# Altium PCB ElectronBot_ASCII.PcbDoc
Units mil, origin at the board's own origin, x right, y up, seen from the top; angles counter-clockwise.
Board outline 1479.69 x 1548.74 mil, 2 copper layers (Top1, Bottom2), stack 42.17 mil thick; 49 components, 55 nets, 261 pads, 229 vias.
Unrouted connection lines stored in the file: 11.
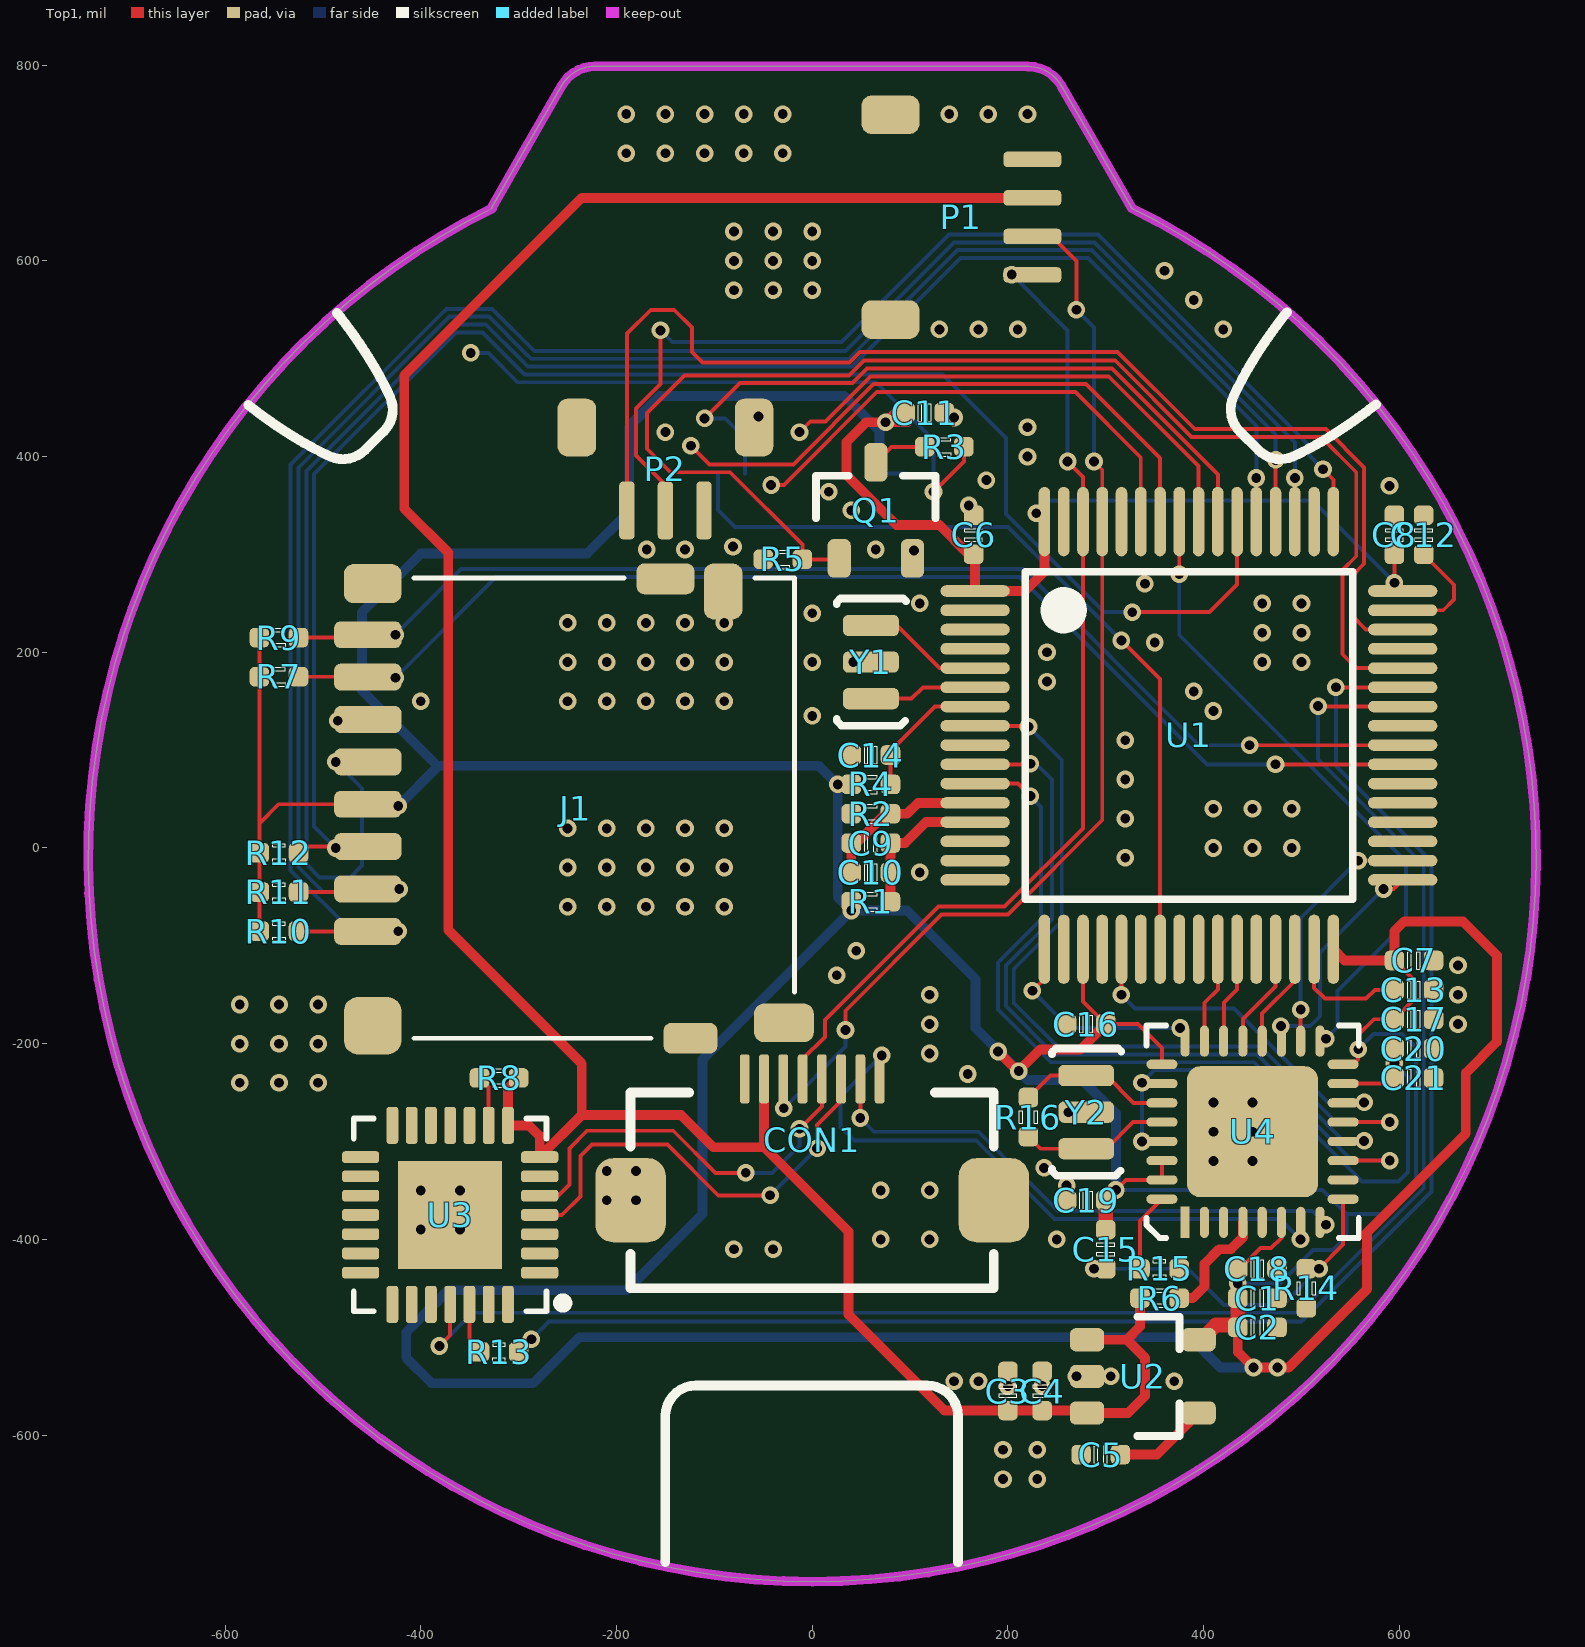
[diagram p0: Top1 view]
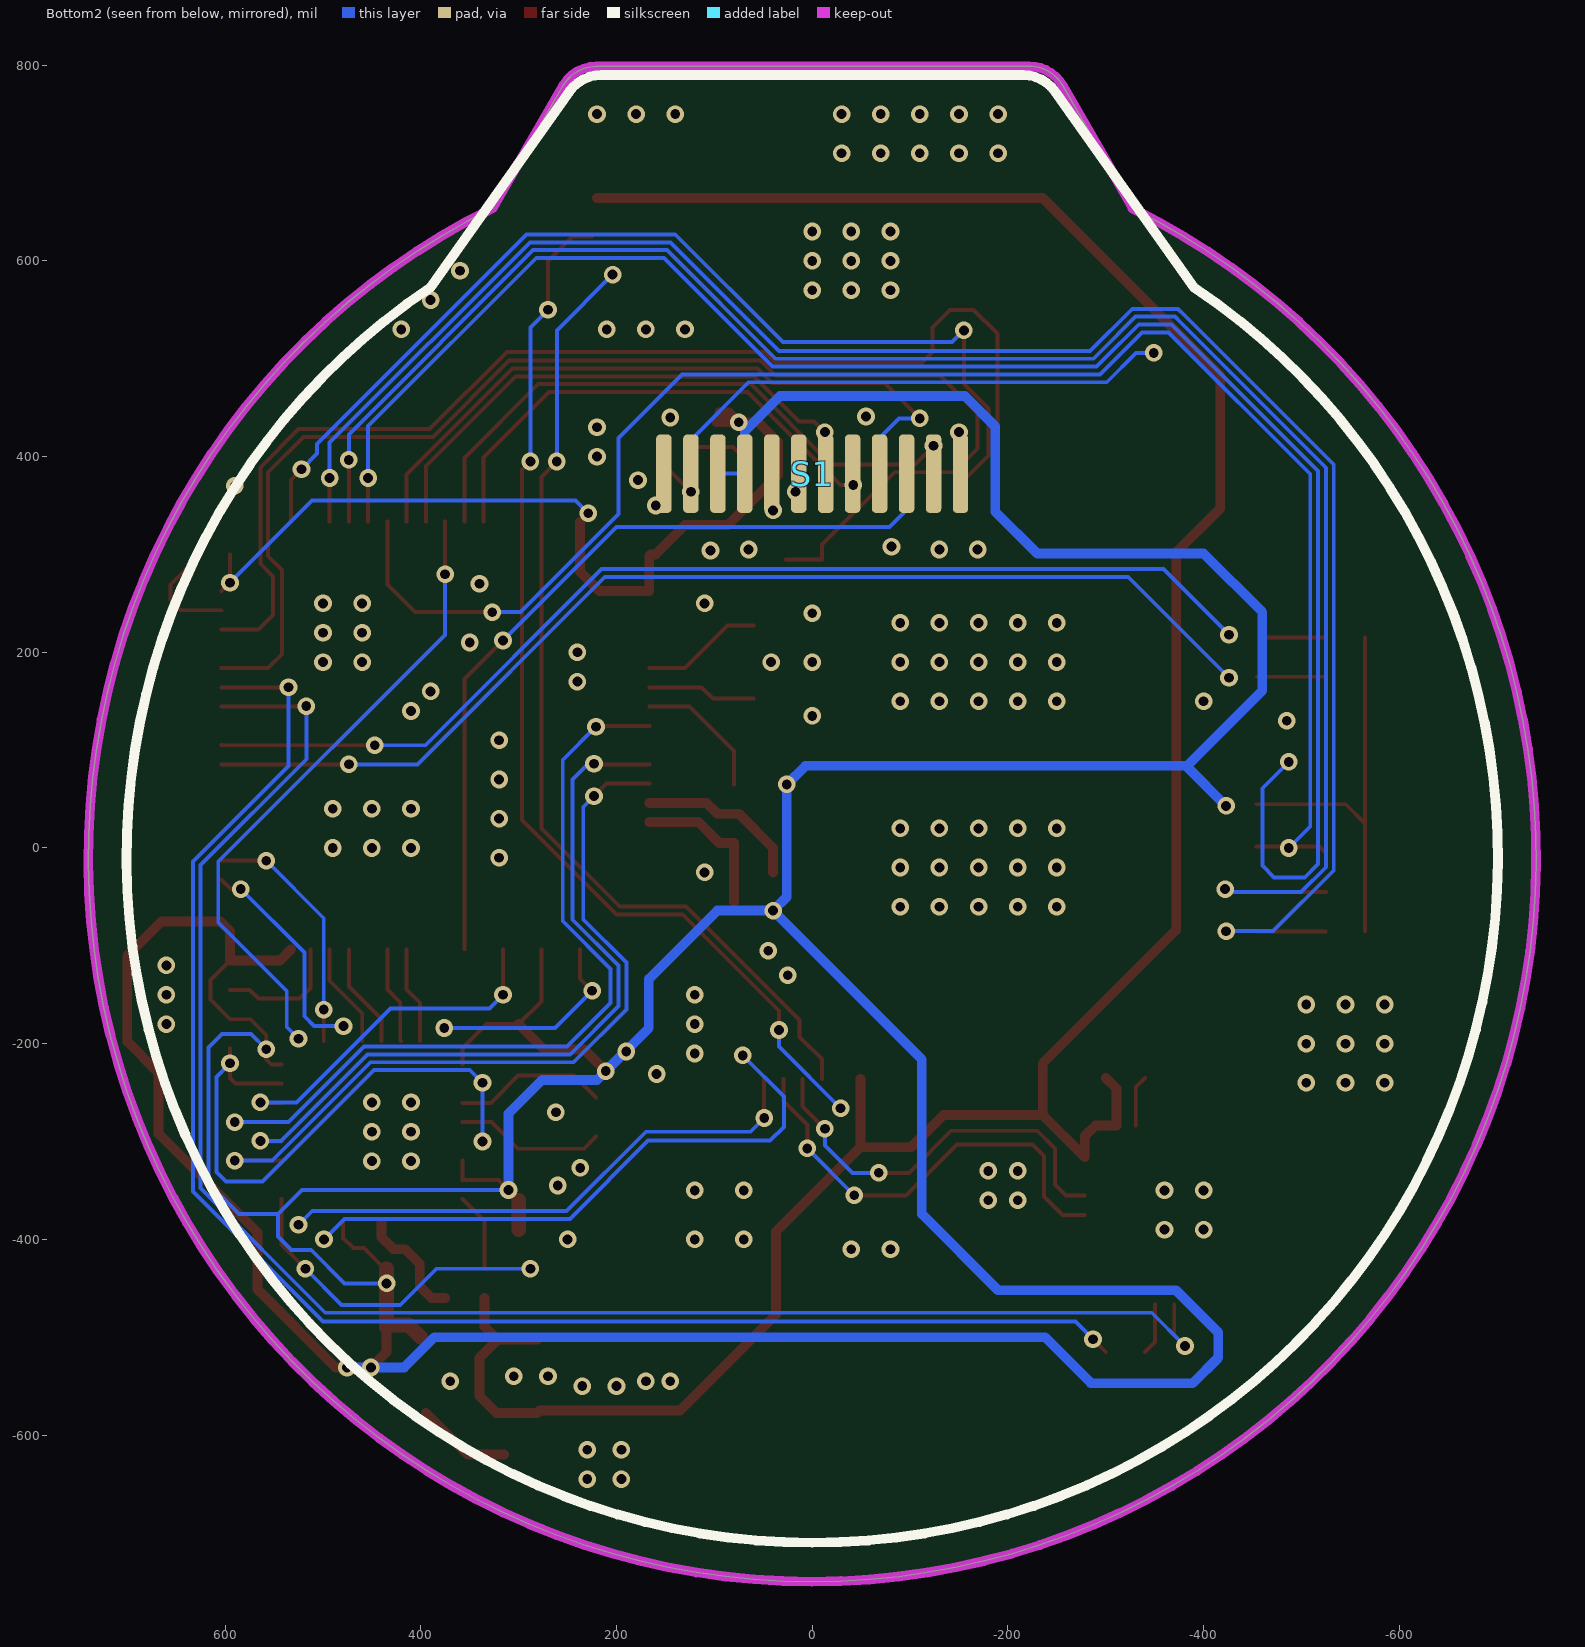
[diagram p1: Bottom2 view, seen from below]

## Layer stack, top to bottom
Top Solder: solder mask 0.4, Solder Resist, Dk 3.5
Top1: signal copper 1.4
Dielectric 1: prepreg 39.3701, PP-006, Dk 4.1
Bottom2: signal copper 1.4
Bottom Solder: solder mask 0.4, Solder Resist, Dk 3.5

## Board outline
-327.58,654.33 -292.13,716.15 -256.03,779.09 cw(c-221.88,759.5) -221.87,798.87 220.56,798.71 cw(c220.54,759.34) 254.64,779.01 290.88,716.22 326.65,654.22 326.51,653.93 cw(c0,-10)

## Design rules (kind name [scope] priority, off if disabled: settings)
AssemblyTestPointUsage [All] p0: scope1count=1 scope1_0_kind=Board scope1_0_value=Board scope2count=1 scope2_0_kind=Board scope2_0_value=Board commentlength=0
AssemblyTestpoint [All] p0: scope1count=1 scope1_0_kind=Board scope1_0_value=Board scope2count=1 scope2_0_kind=Board scope2_0_value=Board commentlength=0
Clearance Clearance_Logo [All] p0: scope1count=1 scope1_0_kind=NetClass scope1_0_value=Logo scope2count=1 scope2_0_kind=Board scope2_0_value=Board commentlength=0 gap=8
Clearance [All] p0: scope1count=1 scope1_0_kind=Board scope1_0_value=Board scope2count=1 scope2_0_kind=Board scope2_0_value=Board commentlength=0 gap=4
Clearance Clearance_Logo [InNetClass('Logo')] p1: gap=8 ignorepadtopadclearanceinfootprint=FALSE
Clearance [All] p2: gap=4 ignorepadtopadclearanceinfootprint=FALSE except(0: Arc-Hole Track-Hole SMDPad-Hole THPad-Hole Via-Hole Fill-Hole Poly-Hole Region-Hole Text-Hole)
ComponentClearance [All] p0: scope1count=1 scope1_0_kind=Board scope1_0_value=Board scope2count=1 scope2_0_kind=Board scope2_0_value=Board commentlength=0 gap=0 collisioncheckmode=3
ComponentClearance [All] p1: gap=0 collisioncheckmode=3 verticalgap=0 showdistances=FALSE
DiffPairsRouting [All] p0: scope1count=1 scope1_0_kind=Board scope1_0_value=Board scope2count=1 scope2_0_kind=Board scope2_0_value=Board commentlength=0
DiffPairsRouting [All] p1: maxlimit=9 minlimit=9 mostfreqgap=9 toplayer_minwidth=15 toplayer_maxwidth=15 toplayer_prefwidth=15 bottomlayer_minwidth=15 bottomlayer_maxwidth=15 bottomlayer_prefwidth=15 maxuncoupledlength=500
FabricationTestPointUsage [All] p0: scope1count=1 scope1_0_kind=Board scope1_0_value=Board scope2count=1 scope2_0_kind=Board scope2_0_value=Board commentlength=0 valid=0 allowmultiple=FALSE
FabricationTestpoint [All] p0: scope1count=1 scope1_0_kind=Board scope1_0_value=Board scope2count=1 scope2_0_kind=Board scope2_0_value=Board commentlength=0 side=3 testpointundercomponent=TRUE minsize=40 maxsize=100 preferedsize=60 minholesize=0 maxholesize=40 preferedholesize=32 testpointgrid=1
FanoutControl Fanout_BGA [All] p0: scope1count=1 scope1_0_kind=Board scope1_0_value=Board scope2count=1 scope2_0_kind=Board scope2_0_value=Board commentlength=26 // Fanout_BGA (Default Rule)
FanoutControl Fanout_LCC [All] p0 off: scope1count=1 scope1_0_kind=Board scope1_0_value=Board scope2count=1 scope2_0_kind=Board scope2_0_value=Board commentlength=69 // Protel DXP Scope 1 Expression Was: IsLCC   Fanout_LCC (Default Rule)
FanoutControl Fanout_SOIC [All] p0 off: scope1count=1 scope1_0_kind=Board scope1_0_value=Board scope2count=1 scope2_0_kind=Board scope2_0_value=Board commentlength=71 // Protel DXP Scope 1 Expression Was: IsSOIC   Fanout_SOIC (Default Rule)
FanoutControl Fanout_Small [All] p0 off: scope1count=1 scope1_0_kind=Board scope1_0_value=Board scope2count=1 scope2_0_kind=Board scope2_0_value=Board commentlength=84 // Protel DXP Scope 1 Expression Was: (CompPinCount < 5)   Fanout_Small (Default Rule)
FanoutControl Fanout_Default [All] p0: scope1count=1 scope1_0_kind=Board scope1_0_value=Board scope2count=1 scope2_0_kind=Board scope2_0_value=Board commentlength=30 // Fanout_Default (Default Rule)
FanoutControl Fanout_BGA [All] p1: bgadir=Out bgaviamode=Centered fanoutstyle=Auto fanoutdirection=Alternating viagrid=1 // Fanout_BGA (Default Rule)
Height [All] p0: scope1count=1 scope1_0_kind=Board scope1_0_value=Board scope2count=1 scope2_0_kind=Board scope2_0_value=Board commentlength=0
HoleSize [All] p0: scope1count=1 scope1_0_kind=Board scope1_0_value=Board scope2count=1 scope2_0_kind=Board scope2_0_value=Board commentlength=0 absolutevalues=TRUE maxlimit=10000 minlimit=8 maxpercent=80.000 minpercent=20.000
HoleSize [All] p1: absolutevalues=TRUE maxlimit=10000 minlimit=8 maxpercent=80.000 minpercent=20.000
HoleToHoleClearance [All] p0: scope1count=1 scope1_0_kind=Board scope1_0_value=Board scope2count=1 scope2_0_kind=Board scope2_0_value=Board commentlength=0
LayerPairs [All] p0: scope1count=1 scope1_0_kind=Board scope1_0_value=Board scope2count=1 scope2_0_kind=Board scope2_0_value=Board commentlength=0 enforce=TRUE
MinimumSolderMaskSliver [All] p0 off: scope1count=1 scope1_0_kind=Board scope1_0_value=Board scope2count=1 scope2_0_kind=Board scope2_0_value=Board commentlength=0
MinimumSolderMaskSliver [All] p1 off: minsoldermaskwidth=2
NetAntennae [All] p0: scope1count=1 scope1_0_kind=Board scope1_0_value=Board scope2count=1 scope2_0_kind=Board scope2_0_value=Board commentlength=0
PasteMaskExpansion [All] p0: scope1count=1 scope1_0_kind=Board scope1_0_value=Board scope2count=1 scope2_0_kind=Board scope2_0_value=Board commentlength=0 expansion=0
PlaneClearance [All] p0: scope1count=1 scope1_0_kind=Board scope1_0_value=Board scope2count=1 scope2_0_kind=Board scope2_0_value=Board commentlength=0 clearance=8
PlaneClearance [All] p1: clearance=8
PlaneConnect [All] p0: scope1count=1 scope1_0_kind=Board scope1_0_value=Board scope2count=1 scope2_0_kind=Board scope2_0_value=Board commentlength=0 planeconnectstyle=Direct reliefexpansion=20 reliefentries=4 reliefconductorwidth=10 reliefairgap=10
PlaneConnect [All] p1: planeconnectstyle=Direct reliefexpansion=20 reliefentries=4 reliefconductorwidth=10 reliefairgap=10
PolygonConnect [All] p0: scope1count=1 scope1_0_kind=Board scope1_0_value=Board scope2count=1 scope2_0_kind=Board scope2_0_value=Board commentlength=0 connectstyle=Direct reliefconductorwidth=10 reliefentries=4 polygonreliefangle="90 Angle"
PolygonConnect [All] p1: connectstyle=Direct reliefconductorwidth=10 reliefentries=4 polygonreliefangle="90 Angle" airgapwidth=10
RoutingCorners [All] p0: scope1count=1 scope1_0_kind=Board scope1_0_value=Board scope2count=1 scope2_0_kind=Board scope2_0_value=Board commentlength=0 cornerstyle=45-Degree minsetback=100 maxsetback=100
RoutingLayers [All] p0: scope1count=1 scope1_0_kind=Board scope1_0_value=Board scope2count=1 scope2_0_kind=Board scope2_0_value=Board commentlength=0 top layer=Automatic bottom layer=Automatic
RoutingPriority [All] p0: scope1count=1 scope1_0_kind=Board scope1_0_value=Board scope2count=1 scope2_0_kind=Board scope2_0_value=Board commentlength=0
RoutingTopology [All] p0: scope1count=1 scope1_0_kind=Board scope1_0_value=Board scope2count=1 scope2_0_kind=Board scope2_0_value=Board commentlength=0 topology=Shortest
RoutingVias [All] p0: scope1count=1 scope1_0_kind=Board scope1_0_value=Board scope2count=1 scope2_0_kind=Board scope2_0_value=Board commentlength=0 holewidth=8 width=16 viastyle="Through Hole" minholewidth=6 minwidth=12 maxholewidth=28 maxwidth=50
RoutingVias [All] p1: holewidth=8 width=16 viastyle="Through Hole" minholewidth=6 minwidth=12 maxholewidth=28 maxwidth=50
ShortCircuit [All] p0: scope1count=1 scope1_0_kind=Board scope1_0_value=Board scope2count=1 scope2_0_kind=Board scope2_0_value=Board commentlength=0 allowed=FALSE
SilkToBoardRegionClearance [All] p0: scope1count=1 scope1_0_kind=Board scope1_0_value=Board scope2count=1 scope2_0_kind=Board scope2_0_value=Board commentlength=0
SilkToSilkClearance [All] p0: scope1count=1 scope1_0_kind=Board scope1_0_value=Board scope2count=1 scope2_0_kind=Board scope2_0_value=Board commentlength=0
SilkToSilkClearance [All] p1: silktosilkclearance=0
SilkToSolderMaskClearance [All] p0 off: scope1count=1 scope1_0_kind=Board scope1_0_value=Board scope2count=1 scope2_0_kind=Board scope2_0_value=Board commentlength=44 // Protel DXP Scope 1 Expression Was: IsPad
SilkToSolderMaskClearance [IsPad] p1: minsilkscreentomaskgap=0 clearancetoexposedcopper=TRUE
SolderMaskExpansion [All] p0: scope1count=1 scope1_0_kind=Board scope1_0_value=Board scope2count=1 scope2_0_kind=Board scope2_0_value=Board commentlength=0 expansion=3
SolderMaskExpansion [All] p1: expansion=3
UnRoutedNet [All] p0: scope1count=1 scope1_0_kind=Board scope1_0_value=Board scope2count=1 scope2_0_kind=Board scope2_0_value=Board commentlength=0
UnpouredPolygon [All] p0: scope1count=1 scope1_0_kind=Board scope1_0_value=Board scope2count=1 scope2_0_kind=Board scope2_0_value=Board commentlength=0
Width Logo [All] p0: scope1count=1 scope1_0_kind=NetClass scope1_0_value=Logo scope2count=1 scope2_0_kind=Board scope2_0_value=Board commentlength=0 maxlimit=100 minlimit=0.1 preferedwidth=10
Width VCC [All] p0 off: scope1count=1 scope1_0_kind=Board scope1_0_value=Board scope2count=1 scope2_0_kind=Board scope2_0_value=Board commentlength=237 maxlimit=50 minlimit=4 preferedwidth=10 // Protel DXP Scope 1 Expression Was: (InNet('VDD_SYS_3.3V') OR InNet('VDD_AV_3.3V') OR InNet('VDD_5V') OR InNet('VDD1V2-SYS') OR InNet('VDD1V1-EPHY') OR InNet('VDD-CPUX') OR InNet('VDD-CPUS') OR InNet('VDD-CPUFB') OR InNet('VCC-DRAM'))
Width GND [All] p0 off: scope1count=1 scope1_0_kind=Board scope1_0_value=Board scope2count=1 scope2_0_kind=Board scope2_0_value=Board commentlength=70 maxlimit=50 minlimit=4 preferedwidth=10 // Protel DXP Scope 1 Expression Was: (InNet('AGND') OR InNet('GND'))
Width [All] p0: scope1count=1 scope1_0_kind=Board scope1_0_value=Board scope2count=1 scope2_0_kind=Board scope2_0_value=Board commentlength=0 maxlimit=10000 minlimit=4 preferedwidth=4
Width Logo [InNetClass('Logo')] p1: maxlimit=100 minlimit=0.1 preferedwidth=10
Width GND [(InNet('AGND') OR InNet('GND'))] p2: maxlimit=50 minlimit=4 preferedwidth=10
Width VCC [(InNet('VDD_SYS_3.3V') OR InNet('VDD_AV_3.3V') OR InNet('VDD_5V') OR InNet('VDD1V2-SYS') OR InNet('VDD1V1-EPHY') OR InNet('VDD-CPUX') OR InNet('VDD-CPUS') OR InNet('VDD-CPUFB') OR InNet('VCC-DRAM'))] p3: maxlimit=50 minlimit=4 preferedwidth=10
Width [All] p4: maxlimit=10000 minlimit=4 preferedwidth=4
21 further rules are at their usual default settings.

## Components (designator, comment, footprint, x,y, rotation, side; value= is the part's Value field where it differs from the comment)
C1 "0.1uF" CAP_0402 455,-460 r180 top
C2 "10uF" CAP_0402 455,-490 r180 top
C3 "10uF" CAP_0402 200,-555 r270 top
C4 "0.1uF" CAP_0402 235,-555 r270 top
C5 "10nF" CAP_0402 295,-620 r0 top
C6 "0.1uF" CAP_0402 165,320 r270 top
C7 "0.1uF" CAP_0402 615,-115 r180 top
C8 "0.1uF" CAP_0402 595,320 r270 top
C9 "0.1uF" CAP_0402 60,5 r0 top
C10 "10uF" CAP_0402 60,-25 r0 top
C11 "0.1uF" CAP_0402 115,445 r180 top
C12 "10uF" CAP_0402 625,320 r270 top
C13 "10uF" CAP_0402 615,-145 r180 top
C14 "0.1uF" CAP_0402 60,95 r0 top
C15 "10nF" CAP_0402 300,-410 r270 top
C16 "0.1uF" CAP_0402 280,-180 r180 top
C17 "0.1uF" CAP_0402 615,-175 r0 top
C18 "0.1uF" CAP_0402 455,-430 r0 top
C19 "0.1uF" CAP_0402 280,-360 r180 top
C20 "10uF" CAP_0402 615,-205 r0 top
C21 "0.1uF" CAP_0402 615,-235 r0 top
CON1 "FFC_0.5_8" FFC_0.5_8 0,-325 r0 top
J1 "TF-Socket" "TF-Card-Amphenol with TF" -454.13,44.68 r270 top locked
P1 "SH1.0-4P" SH1.0-4P 225,644.69 r270 top locked
P2 "SH1.0-3P-STAND" SH1.0-3P-STAND -150,345 r180 top locked
Q1 "AO3400A" SOT23-3 65,345 r90 top locked
R1 "0R" RES_0402 60,-55 r180 top
R2 "0R" RES_0402 60,35 r180 top
R3 "10R" RES_0402 135,410 r0 top
R4 "10K" RES_0402 60,65 r180 top
R5 "10K" RES_0402 -30,295 r0 top
R6 "0R" RES_0402 355,-460 r0 top
R7 "47K" RES_0402 -545,175 r0 top
R8 "10K" RES_0402 -320,-235 r180 top
R9 "47K" RES_0402 -545,215 r0 top
R10 "47K" RES_0402 -545,-85 r0 top
R11 "47K" RES_0402 -545,-45 r0 top
R12 "47K" RES_0402 -545,-5 r0 top
R13 "200R" RES_0402 -320,-515 r180 top
R14 "10K" RES_0402 505,-450 r270 top
R15 "12K" RES_0402 355,-430 r0 top
R16 "1M" RES_0402 221,-275 r90 top
S1 "LCD-240x240-ROUND" LCD-240x240-ROUND 0,65 r0 bottom locked
U1 "STM32F405RGT6" LQFP-64_N 385,115 r0 top locked
U2 "LP2992 3V3" SOT23-5 340,-540 r0 top
U3 "CP2102" QFN-28 -370,-375 r180 top
U4 "USB3300-EZK-TR" QFN-32 450,-290 r90 top
Y1 "8MHz" 晶振-3P 60,190 r270 top
Y2 "24MHz" 晶振-3P 280,-270 r270 top

## Footprints (in the part's own frame and the unit in brackets; to place one, negate y for a bottom-side part, rotate by r counter-clockwise, add the part's x,y. Pads: shape width x height; smd on the part's side, far side on the other; paste and mask are expansions set on the pad)
CAP_0402 [mil]
  rrect50% 20x20 smd: 1(-20,0) 2(20,0)
  silkscreen extent -7,-9 7,9
FFC_0.5_8 [mil]
  rrect50% 72x86 smd: 0(-185.63,-35) 0(185.63,-35)
  rrect50% 10x50 smd: 1(-68.9,89) 2(-49.21,89) 3(-29.53,89) 4(-9.84,89) 5(9.84,89) 6(29.53,89) 7(49.21,89) 8(68.9,89)
  silkscreen extent -186,-125 186,75
LCD-240x240-ROUND [mm]
  rrect50% 0.4x2.032 smd: 1(3.85,-8.066) 2(3.15,-8.066) 3(2.45,-8.066) 4(1.75,-8.066) 5(1.05,-8.066) 6(0.35,-8.066) 7(-0.35,-8.066) 8(-1.05,-8.066) 9(-1.75,-8.066) 10(-2.45,-8.066) 11(-3.15,-8.066) 12(-3.85,-8.066)
  silkscreen extent -17.8,-18.41 17.8,19.69
LQFP-64_N [mm] "Thin QFP, 64-Leads, Body 10x10mm, Pitch 0.5mm, IPC Medium Density"
  oval 1.8x0.3 smd: 1(-5.55,3.75) 2(-5.55,3.25) 3(-5.55,2.75) 4(-5.55,2.25) 5(-5.55,1.75) 6(-5.55,1.25) 7(-5.55,0.75) 8(-5.55,0.25) 9(-5.55,-0.25) 10(-5.55,-0.75) 11(-5.55,-1.25) 12(-5.55,-1.75) 13(-5.55,-2.25) 14(-5.55,-2.75) 15(-5.55,-3.25) 16(-5.55,-3.75) 33(5.55,-3.75) 34(5.55,-3.25) 35(5.55,-2.75) 36(5.55,-2.25) 37(5.55,-1.75) 38(5.55,-1.25) 39(5.55,-0.75) 40(5.55,-0.25) 41(5.55,0.25) 42(5.55,0.75) 43(5.55,1.25) 44(5.55,1.75) 45(5.55,2.25) 46(5.55,2.75) 47(5.55,3.25) 48(5.55,3.75)
  oval 0.3x1.8 smd: 17(-3.75,-5.55) 18(-3.25,-5.55) 19(-2.75,-5.55) 20(-2.25,-5.55) 21(-1.75,-5.55) 22(-1.25,-5.55) 23(-0.75,-5.55) 24(-0.25,-5.55) 25(0.25,-5.55) 26(0.75,-5.55) 27(1.25,-5.55) 28(1.75,-5.55) 29(2.25,-5.55) 30(2.75,-5.55) 31(3.25,-5.55) 32(3.75,-5.55) 49(3.75,5.55) 50(3.25,5.55) 51(2.75,5.55) 52(2.25,5.55) 53(1.75,5.55) 54(1.25,5.55) 55(0.75,5.55) 56(0.25,5.55) 57(-0.25,5.55) 58(-0.75,5.55) 59(-1.25,5.55) 60(-1.75,5.55) 61(-2.25,5.55) 62(-2.75,5.55) 63(-3.25,5.55) 64(-3.75,5.55)
  silkscreen extent -4.25,-4.25 4.25,4.25
QFN-28 [mil]
  rrect50% 38x12 smd mask+0: 1(-91.5,59.06) 2(-91.5,39.37) 3(-91.5,19.68) 4(-91.5,0) 5(-91.5,-19.68) 6(-91.5,-39.37) 7(-91.5,-59.06) 15(91.5,-59.06) 16(91.5,-39.37) 17(91.5,-19.68) 18(91.5,0) 19(91.5,19.68) 20(91.5,39.37) 21(91.5,59.06)
  rrect50% 12x38 smd mask+0: 8(-59.06,-91.5) 9(-39.37,-91.5) 10(-19.69,-91.5) 11(0,-91.5) 12(19.68,-91.5) 13(39.37,-91.5) 14(59.06,-91.5) 22(59.06,91.5) 23(39.37,91.5) 24(19.68,91.5) 25(0,91.5) 26(-19.69,91.5) 27(-39.37,91.5) 28(-59.06,91.5)
  rect 106.3x110.24 smd: 29(0,0)
  silkscreen extent -120,-99 99,99
QFN-32 [mm]
  rect 0.81x0.239 smd paste+0 mask+0: 1(-2.351,1.75)
  rrect100% 0.81x0.239 smd paste+0 mask+0: 2(-2.351,1.25) 3(-2.351,0.75) 4(-2.351,0.25) 5(-2.351,-0.25) 6(-2.351,-0.75) 7(-2.351,-1.25) 8(-2.351,-1.75) 17(2.351,-1.75) 18(2.351,-1.25) 19(2.351,-0.75) 20(2.351,-0.25) 21(2.351,0.25) 22(2.351,0.75) 23(2.351,1.25) 24(2.351,1.75)
  rrect100% 0.239x0.81 smd paste+0 mask+0: 9(-1.75,-2.351) 10(-1.25,-2.351) 11(-0.75,-2.351) 12(-0.25,-2.351) 13(0.25,-2.351) 14(0.75,-2.351) 15(1.25,-2.351) 16(1.75,-2.351) 25(1.75,2.351) 26(1.25,2.351) 27(0.75,2.351) 28(0.25,2.351) 29(-0.25,2.351) 30(-0.75,2.351) 31(-1.25,2.351) 32(-1.75,2.351)
  rrect20% 3.4x3.4 smd paste-1000 mask+0: 33(0,0)
  silkscreen extent -2.76,-2.76 2.76,2.76
RES_0402 [mil]
  rrect50% 20x20 smd: 1(-20,0) 2(20,0)
  silkscreen extent -7,-10 7,10
SH1.0-3P-STAND [mm]
  rrect50% 0.4x1.5 smd: 1(-1,0) 2(0,0) 3(1,0)
  rrect50% 1x1.5 smd: SH1(-2.3,-2.15) SH2(2.3,-2.15)
SH1.0-4P [mm]
  rrect50% 0.4x1.5 smd: 1(-1.5,0) 2(-0.5,0) 3(0.5,0) 4(1.5,0)
  rrect50% 1x1.5 smd: SH1(-2.659,-3.683) SH2(2.659,-3.683)
SOT23-3 [mm] "SOT23, 3-Leads, Body 3.1x3.0mm (max), Pitch 0.95mm, IPC Medium Density"
  rrect50% 1x0.6 smd: 1(-1.246,0.95) 2(-1.246,-0.95) 3(1.246,0)
  silkscreen extent -0.2,-1.55 0.9,1.55
SOT23-5 [mm] "SOT23, 3-Leads, Body 3.1x3.0mm (max), Pitch 0.95mm, IPC Medium Density"
  rrect50% 0.889x0.6 smd: 1(-1.5,0.95) 2(-1.5,0) 3(-1.5,-0.95) 4(1.396,-0.95) 5(1.396,0.95)
  silkscreen extent -0.2,-1.55 0.9,1.55
"TF-Card-Amphenol with TF" [mm]
  rrect50% 0.7x1.75 smd: 1(3.3,0) 2(2.2,0) 3(1.1,0) 4(0,0) 5(-1.1,0) 6(-2.2,0) 7(-3.3,0) 8(-4.4,0)
  rrect50% 1x1.55 smd: 9(5.675,10.8)
  rrect50% 1.45x1 smd: 10(-5.525,9.225)
  rrect50% 1.5x1.5 smd: S1(5.75,0.125)
  rrect50% 1.016x1.5 smd: S2(-5.727,0.125)
  rrect50% 0.8x1.4 smd: S3(6.075,8.375)
  rrect50% 0.8x1.5 smd: S4(-5.85,7.725)
  silkscreen extent -5.87,1.19 6.07,11.07
晶振-3P [mm] "贴片晶振"
  rrect50% 0.55x1.45 smd: 1(-0.95,0) 2(0,0) 3(0.95,0)
  silkscreen extent -1.65,-0.89 1.65,0.91

## Part data
C1 C2 C3 C4 C5 C6 C7 C8 C9 C10 C11 C12 C13 C14 C15 C16 C17 C18 C19 C20 C21: library part 电容-0402, "Capacitor"
CON1: "FFC"
J1: "10 _8 + 2_ Position Card Connector Secure Digital - microSDa?￠ Surface Mount, Right Angle Gold"
P2: "Header"
Q1: "N-MOS"
R1 R2 R3 R4 R5 R6 R7 R8 R9 R10 R11 R12 R13 R14 R15 R16: library part 电阻-0402, "Resistor"
S1: "显示屏"
U1: "ARM Cortex-M4 32-bit MCU+FPU, 210 DMIPS, 1024 kB Flash, 192 kB Internal RAM, 51 I/Os, 64-pin LQFP, -40 to 85 degC, Tray"
U2: library part LP2992, "LDO"
U3: "USBתTTL"
Y1 Y2: library part 晶振-3Pin, "村田贴片"

## Via types
v1: diameter 18, hole 10, Top1 to Bottom2, tented both sides, 229 vias

## Nets (pads, with @x,y where several pads share a name; then routed paths per layer and width w, separated by ;. In a path a pad name is that pad's centre, name@x,y a point inside that pad or via, vN(x,y) a via of type N, cw(c..) or ccw(c..) an arc to the next point about the centre after c; other vN are vias at no path point)
AGND: C9.1 C10.1 R2.1 U1.12 | length 170.6
  Top1 w10: C10.1 40,0 75,35 R2.1 97,35 108.1,46.1 U1.12
AVCC: C9.2 C10.2 R1.1 U1.13 | length 155.4
  Top1 w10: R1.1 C10.2 C9.2 95,5 116.42,26.42 U1.13
GND: C1.1 C2.1 C3.1 C4.1 C5.1 C6.1 C7.1 C8.1 C11.1 C12.1 C13.1 C14.1 C16.2 C17.2 C18.2 C19.2 C20.2 C21.2 CON1.0 CON1.1 J1.6 J1.9 J1.10 J1.S1 J1.S2 J1.S3 J1.S4 P1.1 P1.SH1 P1.SH2 P2.1 P2.SH1 P2.SH2 Q1.2 R2.2 R5.1 R14.2 R15.2 S1.1 S1.5 S1.6 S1.12 U1.18 U1.28 U1.60 U1.63 U2.2 U3.3 U3.29 U4.1 U4.2 U4.33 Y1.2 Y2.2
  other v1: 195,-645 230,-645 195,-615 230,-615 200,-550 235,-550 145,-545 170,-545 370,-545 270,-540 305,-540 -80,-410 -40,-410 70,-400 120,-400 250,-400 -400,-390 -360,-390 -210,-360 -180,-360 -400,-350 -360,-350 70,-350 120,-350 260,-345 -210,-330 -180,-330 237,-327 410,-320 450,-320 410,-290 450,-290 262,-270 410,-260 450,-260 -585,-240 -545,-240 -505,-240 159,-231 120,-210 -585,-200 -545,-200 -505,-200 120,-180 660,-180 -585,-160 -545,-160 -505,-160 120,-150 660,-150 25,-130 660,-120 45,-105 -250,-60 -210,-60 -170,-60 -130,-60 -90,-60 110,-25 -250,-20 -210,-20 -170,-20 -130,-20 -90,-20 320,-10 410,0 450,0 490,0 -250,20 -210,20 -170,20 -130,20 -90,20 320,30 410,40 450,40 490,40 320,70 320,110 -485,130 0,135 410,140 -400,150 -250,150 -210,150 -170,150 -130,150 -90,150 390,160 240,170 -250,190 -210,190 -170,190 -130,190 -90,190 0,190 42,190 460,190 500,190 240,200 350,210 460,220 500,220 -250,230 -210,230 -170,230 -130,230 -90,230 0,240 110,250 460,250 500,250 340,270 104,304 -169,305 -130,305 65,305 -81,308 40,345 160,350 17,364 590,370 178,376 220,400 -150,425 220,430 145,440 -55,441 130,530 170,530 210,530 420,530 390,560 -80,570 -40,570 0,570 360,590 -80,600 -40,600 0,600 -80,630 -40,630 0,630 -190,710 -150,710 -110,710 -70,710 -30,710 -190,750 -150,750 -110,750 -70,750 -30,750 140,750 180,750 220,750
I2C_SCL_1: CON1.3 P1.3 U1.61 | length 1106.7
  Top1 w4: v1(34,-186) 34,-166.31 132.31,-68 200,-68 296.42,28.42 U1.61 296.42,386.58 v1(288,395) ; P1.3 245,625 270,600 v1(270,550)
  Bottom2 w4: v1(-29,-266) 34,-203 v1(34,-186) ; v1(270,550) 288,532 v1(288,395)
I2C_SDA_1: CON1.4 P1.4 U1.62 | length 1010.5
  Top1 w4: CON1.4 -9.84,-215.84 13,-193 13,-176 129,-60 196.69,-60 276.73,20.05 276.73,379.27 v1(261,395)
  Bottom2 w4: v1(204,586) 261,529 v1(261,395)
LCD_BL_1: Q1.1 R5.2 U1.44 | length 1341.3
  Top1 w4: Q1.1@26.65,295 R5.2 -10,310 -84,384 -145,384 -169,408 -169,444.54 -130.54,483 37.75,483 52.75,498 309.69,498 387.69,420 520,420 556,384 556,298.18 542,284.18 542,198 556.1,183.9 U1.44
LCD_CS_1: S1.8 U1.59 | length 510.5
  Top1 w4: v1(-42,371) -29,371 66,466 269,466 335.79,399.21 U1.59
LCD_DC_1: S1.7 U1.56 | length 526.2
  Top1 w4: v1(-13,425) -2,436 13.37,436 59.37,482 303.06,482 394.84,390.22 U1.56
LCD_LEDK_1: R3.2 S1.2 | length 603.2
  Top1 w4: v1(124,364) 155,395 R3.2
  Bottom2 w4: v1(-349,506) -331,506 -301,476 65,476 124.02,416.98 S1.2
LCD_RST_1: S1.11 U1.58 | length 617.6
  Top1 w4: v1(-124,411) -105,392 -19.31,392 62.69,474 280,474 355.47,398.53 U1.58
LCD_SCL_1: S1.9 U1.55 | length 724.7
  Top1 w4: v1(-110,439) -74,475 41.06,475 56.06,490 306.37,490 414.53,381.85 U1.55
  Bottom2 w4: v1(-110,439) -88.83,439 -68.9,419.06 S1.9
LCD_SDA_1: S1.10 U1.23 | length 836.7
  Top1 w4: v1(316,212) 355.47,172.53 U1.23
  Bottom2 w4: S1.10 -96.46,345.46 -79,328 200,328 v1(316,212)
NetC5_2: C5.2 U2.4 | length 97.6
  Top1 w10: C5.2 352.35,-620 U2.4
NetC12_2: C12.2 U1.47 | length 115.9
  Top1 w4: U1.47 644.95,242.95 656,254 656,269 C12.2
NetC13_2: C13.2 U1.31 | length 129.8
  Top1 w4: U1.31 512.95,-142.95 524,-154 566,-154 575,-145 C13.2
NetC14_2: C14.2 R4.1 U1.7 | length 139.4
  Top1 w4: R4.1 C14.2 80,99 125.53,144.53 U1.7
NetC15_2: C15.2 R14.1 U4.9 | length 341.9
  Top1 w4: v1(518,-430) 542.57,-405.43 U4.9
  Bottom2 w4: v1(288,-430) 384,-430 421,-467 481,-467 v1(518,-430)
NetC20_1: C20.1 C21.1 U4.15 U4.26 U4.29 | length 590.4
  Top1 w4: U4.15 589.21,-240.79 C21.1 v1(595,-220) C20.1
  Bottom2 w4: v1(337,-300) v1(337,-240) 350,-227 448,-227 562,-341 599,-341 609,-331 609,-234 v1(595,-220)
NetQ1_3: Q1.3 R3.1 | length 56.6
  Top1 w4: Q1.3 80.94,410 R3.1
NetR6_2: R6.2 U4.4 | length 119.7
  Top1 w10: R6.2 389,-460 401,-448 401,-425 416,-410 428,-410 440.16,-397.84 U4.4
NetR8_2: R8.2 U3.9 | length 52.4
  Top1 w4: R8.2 -330.63,-244.37 U3.9
NetR13_2: R13.2 U3.26 | length 52.8
  Top1 w4: U3.26 -350.31,-504.68 R13.2
NetR15_1: R15.1 U4.32 | length 80.4
  Top1 w4: R15.1 335,-381.33 U4.32
NetR16_1: R16.1 U4.28 Y2.3 | length 152.9
  Top1 w4: R16.1 233.4,-307.4 Y2.3 300.6,-307.4 327.84,-280.16 U4.28
NetR16_2: R16.2 U4.27 Y2.1 | length 157.3
  Top1 w4: R16.2 243.4,-232.6 Y2.1 300.6,-232.6 328.47,-260.47 U4.27
NetU1_5: U1.5 Y1.1 | length 124.5
  Top1 w4: Y1.1 86.6,227.4 130.1,183.9 U1.5
NetU1_6: U1.6 Y1.3 | length 111.3
  Top1 w4: Y1.3 101.6,152.6 113.21,164.21 U1.6
SD_CLK_1: J1.5 U1.53 | length 1852
  Top1 w4: U1.53 v1(453.9,378.1)
  Bottom2 w4: v1(-487,88) -460,61 -460,-18 -472,-30 -503.37,-30 -517,-16.37 -517,385.31 -367.31,535 -333.69,535 -296.69,498 -290.69,492 40.63,492 46.63,498 151.63,603 282,603 453.9,431.1 v1(453.9,378.1)
SD_CMD_1: J1.3 R12.2 U1.54 | length 1707.8
  Top1 w4: R12.2 -518.62,1.38 J1.3 ; v1(327,241) 406,241 434.21,269.21 U1.54
  Bottom2 w4: v1(-487,0) -509,22 -509,382 -364,527 -337,527 -294,484 133,484 198,419 198,341.31 298.31,241 v1(327,241)
SD_D0_1: J1.7 R7.2 U1.39 | length 1222
  Top1 w4: R7.2 J1.7@-454.53,175 ; v1(473.53,85.47) U1.39
  Bottom2 w4: v1(-426,174) -323,277 212,277 403.53,85.47 v1(473.53,85.47)
SD_D1_1: J1.8 R9.2 U1.40 | length 1199.8
  Top1 w4: R9.2 J1.8@-457.05,215 ; v1(447,105) 603.35,105 U1.40
  Bottom2 w4: v1(-426,218) -359,285 215.31,285 395.31,105 v1(447,105)
SD_D2_1: J1.1 R10.2 U1.51 | length 1942.8
  Top1 w4: R10.2@-524.76,-85.24 J1.1 ; U1.51 v1(493.27,378.1)
  Bottom2 w4: v1(-423,-85) -471,-85 -533,-23 -533,391.94 -379.94,545 -373.94,551 -327.06,551 -284.06,508 34,508 145,619 288.63,619 493.27,414.36 v1(493.27,378.1)
SD_D3_1: J1.2 R11.2 U1.52 | length 1884.4
  Top1 w4: R11.2 J1.2@-457.2,-45 ; U1.52 v1(473.58,396.58)
  Bottom2 w4: v1(-422,-42) -425,-45 -499.69,-45 -525,-19.69 -525,388.63 -376.63,537 -370.63,543 -330.37,543 -293.37,506 -287.37,500 37.31,500 148.31,611 285.31,611 473.58,422.73 v1(473.58,396.58)
SWCLK_1: P2.2 U1.49 | length 1097.5
  Top1 w4: v1(-155,529) -155,474 -180,449 -180,401.03 -150,371.03 P2.2 ; v1(522,387) 532.64,376.36 U1.49
  Bottom2 w4: v1(-155,529) -143,517 30,517 140,627 292,627 506,413 506,403 v1(522,387)
SWDIO_1: P2.3 U1.46 | length 1249.5
  Top1 w4: P2.3 -189.37,525.63 -165,550 -141,550 -123,532 -123,507 -112,496 38,496 49,507 312,507 391,428 525,428 564,389 564,290.51 551,277.51 551,238 565.73,223.27 U1.46
UART_RX_1: R13.1 U1.43 | length 1624.9
  Top1 w4: R13.1 v1(-287,-502) ; v1(535.21,164.21) U1.43
  Bottom2 w4: v1(-287,-502) -269,-484 500,-484 633,-351 633,-14 535.21,83.79 v1(535.21,164.21)
UART_TX_1: U1.42 U3.25 | length 1744
  Top1 w4: v1(-381,-509) -370,-498 U3.25 ; v1(517,145) 517.47,144.53 U1.42
  Bottom2 w4: v1(-381,-509) -347,-475 497.69,-475 625,-347.69 625,-17.31 517,90.69 v1(517,145)
USB_CLK_1: U1.21 U4.14 | length 360.9
  Top1 w4: v1@316.1,-149.9 U1.21 ; U4.14 v1@563.53,-260.47
  Bottom2 w4: v1(316,-150) 330,-164 431,-164 527,-260 v1(564,-260)
USB_DATA0_1: U1.17 U4.24 | length 214.4
  Top1 w4: v1(225,-146) 237.36,-133.64 U1.17
  Bottom2 w4: v1(225,-146) 263,-184 v1(376,-184)
USB_DATA1_1: U1.26 U4.23 | length 99.6
  Top1 w4: U4.23 400.79,-158.21 414.53,-144.47 U1.26
USB_DATA2_1: U1.27 U4.22 | length 99.6
  Top1 w4: U4.22 421,-196.9 421,-158 434.21,-144.79 U1.27
USB_DATA3_1: U1.29 U4.21 | length 107.8
  Top1 w4: U4.21 440.16,-174.84 473.58,-141.42 U1.29
USB_DATA4_1: U1.30 U4.20 | length 107.8
  Top1 w4: U4.20 459.84,-169.16 493.27,-135.73 U1.30
USB_DATA5_1: U1.33 U4.19 | length 224.4
  Top1 w4: v1(584,-42) 594.14,-42 U1.33
  Bottom2 w4: v1(479,-182) 509,-182 519,-172 519,-107 v1(584,-42)
USB_DATA6_1: U1.34 U4.18 | length 254.3
  Top1 w4: U4.18 v1(499.21,-165.21) ; v1(558,-13) v1(558,-13) U1.34
  Bottom2 w4: v1(499.21,-165.21) 499.21,-71.79 v1(558,-13)
USB_DATA7_1: U1.57 U4.17 | length 658.5
  Top1 w4: v1(375.16,279.84) U1.57
  Bottom2 w4: v1(375.16,279.84) 375.16,217.84 607,-14 607,-76 537,-146 537,-183 v1(525,-195)
USB_DIR_1: U1.10 U4.12 | length 779.7
  Top1 w4: U1.10 v1@222.47,85.47 ; U4.12 v1@563.53,-299.84
  Bottom2 w4: v1(223,86) 229,86 245,70 245,-73.31 198,-120.31 198,-161.69 247.31,-211 454.63,-211 543,-299.37 v1(564,-299.37)
USB_DM_CP_1: CON1.5 U3.5 | length 421.5
  Top1 w4: U3.5 -259.31,-355.32 -248,-344 -248,-307 -230,-289 -142,-289 -99,-332 v1(-68,-332) ; v1(-13,-287) 9.84,-264.16 CON1.5
  Bottom2 w4: v1(-68,-332) -41,-332 -13,-304 v1(-13,-287)
USB_DM_ST_1: CON1.7 U4.8 | length 560.9
  Top1 w4: v1@49.21,-275.79 CON1.7
  Bottom2 w4: v1(49,-276) 63,-290 170,-290 251,-371 511,-371 v1(525,-385)
USB_DP_CP_1: CON1.6 U3.4 | length 459.9
  Top1 w4: U3.4 -256,-375 -237,-356 -237,-315 -225,-303 -148,-303 -96,-355 v1(-43,-355) ; v1(5,-307) 5,-283 29.53,-258.47 CON1.6
  Bottom2 w4: v1(-43,-355) v1(5,-307)
USB_DP_ST_1: CON1.8 U4.7 | length 608
  Bottom2 w4: v1(71,-212) 29,-254 29,-285 43,-299 167.69,-299 247.69,-379 478,-379 v1(499,-400)
USB_NXT_1: U1.11 U4.11 | length 814.3
  Top1 w4: U1.11 210.21,65.79 v1(223,53) ; U4.11 v1(590.16,-319.53)
  Bottom2 w4: v1(223,53) 234,42 234,-73 190,-117 190,-165 244,-219 451.31,-219 551.84,-319.53 v1(590.16,-319.53)
USB_STP_1: U1.8 U4.13 | length 852.6
  Top1 w4: U1.8 v1@220.16,124.84 ; U4.13 v1(590.16,-280.16)
  Bottom2 w4: v1(221,124) 255,90 255,-74.63 206,-123.63 206,-158.37 250.63,-203 457.94,-203 535.1,-280.16 v1(590.16,-280.16)
VBUS_IN: C3.2 C4.2 CON1.2 P1.2 R6.1 R8.1 U2.1 U2.3 U3.7 U3.8 | length 2697.8
  Top1 w10: R8.1 -310.94,-245.94 U3.8 -289.5,-283.5 -278.5,-294.5 U3.7 -235.56,-273 ; CON1.2 -49.21,-305.79 ; P1.2@220,664.37 -235.63,664.37 -417,483 -417,347 -372,302 -372,-84 -235.56,-220.44 -235.56,-273 ; U2.1 321.6,-502.6 ; R6.1 335,-489.2 321.6,-502.6 ; -235.56,-273 -134,-273 -101.21,-305.79 -49.21,-305.79 ; -49.21,-305.79 37,-392 37,-477 135,-575 C3.2 C4.2 278.54,-575 U2.3 322.6,-577.4 340,-560 340,-521 321.6,-502.6
VCC_3V3: C1.2 C2.2 C6.2 C7.2 C8.2 C11.2 C15.1 C16.1 C17.1 C18.1 C19.1 J1.4 R1.2 R4.2 R7.1 R9.1 R10.1 R11.1 R12.1 S1.3 S1.4 U1.1 U1.19 U1.32 U1.48 U1.64 U2.5 U4.6 U4.16 U4.25 U4.30 U4.31 | length 7300.8
  Top1 w4: R10.1 R11.1 R12.1 -565,25 ; R9.1 R7.1 -565,25 ; J1.4 -545.31,44.68 -565,25 ; U1.19 276.73,-156.73 C16.1 333,-180 357.43,-204.43 U4.25 ; C19.1 v1(310.39,-349.61) 320.79,-339.21 U4.31 U4.30 ; C18.1 437,-430 458,-409 469,-409 479.53,-398.47 U4.6 ; U4.16 552.9,-221.1 558,-216 v1(558,-205.67) 558,-191 574,-175 C17.1 615,-155 615,-135 C7.2 ; C8.2 v1(595,271.14) U1.48
  Top1 w10: C11.2 85,445 v1(75,435) ; C11.2@97.73,435 v1(75,435) ; v1(190,-208) 210,-228 v1(211,-228) 233,-206 274,-206 C16.1 ; U1.64 237.36,282.36 217.64,262.64 U1.1 166.5,298.5 C6.2 160,300 130,330 86,330 35,381 35,415 55,435 v1(75,435) ; C2.2 435,-515 v1(451,-531) v1(475.5,-531) 487,-531 567,-451 567,-393 668,-292 668,-230 700,-198 700,-110 665,-75 605,-75 595,-85 C7.2 544.13,-115 U1.32
  Top1 w15: C15.1 C19.1 ; U2.5@400,-500 412.4,-487.6 432.6,-487.6 C2.2 C1.2 v1(435,-445) C18.1
  Bottom2 w4: S1.4 S1.3 ; v1(229,342) 242,355 511.14,355 v1(595,271.14) ; v1(310.39,-349.61) 521.61,-349.61 546,-374 ; v1(435,-445) 478,-445 512,-411 532,-411 546,-397 546,-374 ; v1(558,-205.67) 573.67,-190 603,-190 617,-204 617,-343 586,-374 546,-374
  Bottom2 w10: v1(-423,43) -383,83 -383,84 ; S1.4 68.9,426.1 33,462 -156,462 -187,431 -187,344 -230,301 -400,301 -460,241 -460,161 -383,84 ; v1(310.39,-349.61) 310.39,-271.39 276,-237 220,-237 v1(211,-228) 167,-184 167,-134 97,-64 v1(40,-64) ; v1(475.5,-531) v1(451,-531) 417,-531 386,-500 -238,-500 -285,-547 -389,-547 -415,-521 -415,-495 -372,-452 -190,-452 -112,-374 -112,-216 v1(40,-64) ; -383,84 7,84 v1(26,65) 26,-50 v1(40,-64)
pads on no net: U1.2 U1.3 U1.4 U1.9 U1.14 U1.15 U1.16 U1.20 U1.22 U1.24 U1.25 U1.35 U1.36 U1.37 U1.38 U1.41 U1.45 U1.50 U3.1 U3.2 U3.6 U3.10 U3.11 U3.12 U3.13 U3.14 U3.15 U3.16 U3.17 U3.18 U3.19 U3.20 U3.21 U3.22 U3.23 U3.24 U3.27 U3.28 U4.3 U4.5 U4.10

## Polygon pours and split planes (outlines as drawn)
GND on Top1 "NONET_L01_P-001" (solid, remove dead copper, pour order 0): -800,850 800,850 800,-800 -800,-800
GND on Bottom2 "NONET_L01_P-001" (solid, remove dead copper, pour order 1): -800,850 800,850 800,-800 -800,-800

## Keep-outs
Keep-Out Layer:
  lines w10: -327.58,654.33 -292.13,716.15 -256.03,779.09 cw(c-221.88,759.5) -221.87,798.87 220.56,798.71 cw(c220.54,759.34) 254.64,779.01 290.88,716.22 326.65,654.22 ; -327.21,653.58 ccw(c0,-10) 326.51,653.93

## Silkscreen, mask and mechanical layers (free items; w line width, h text height)
Top Overlay:
  drawing of 343 lines, arcs and shapes, not listed
Mechanical 1:
  lines w10: -327.58,654.33 -292.13,716.15 -256.03,779.09 cw(c-221.88,759.5) -221.87,798.87 220.56,798.71 cw(c220.54,759.34) 254.64,779.01 290.88,716.22 326.65,654.22 ; -327.21,653.58 ccw(c0,-10) 326.51,653.93